# Altium PCB BAZ-DOTMATRIX-01R03.PcbDoc (part 3 of 3)
Units mil, origin at the board's own origin, x right, y up, seen from the top; angles counter-clockwise.
Board outline 13550 x 7110 mil, 2 copper layers (Top Layer, Bottom Layer); 256 components, 104 nets, 660 pads, 118 vias.
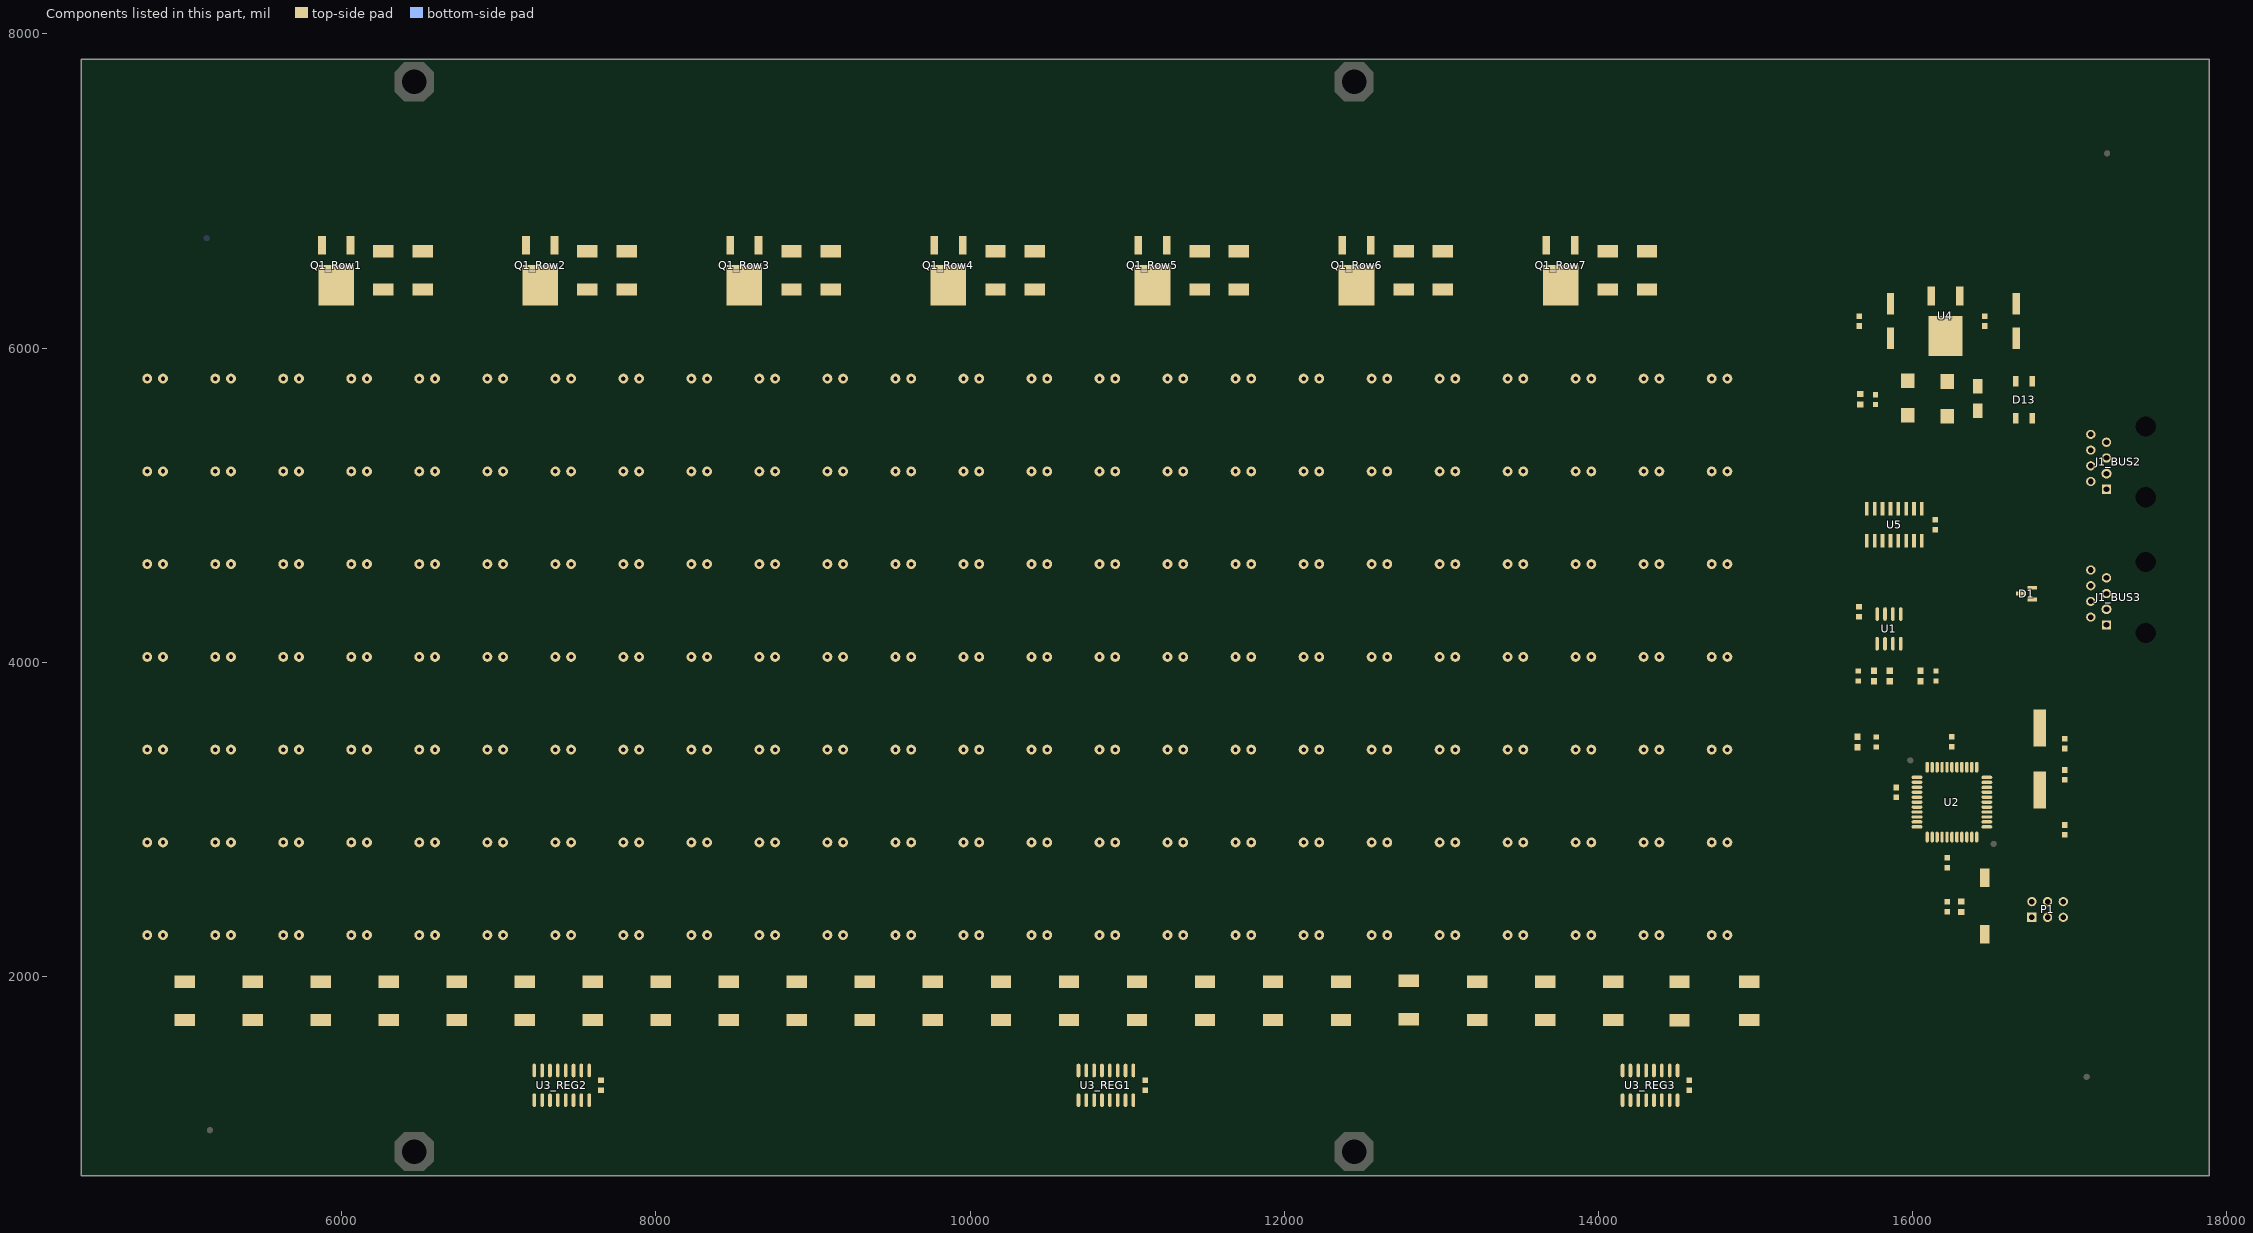
[diagram p3: the components of this part, seen from the top]

## Polygon pours and split planes (outlines as drawn) (continued)
RES12 on Top Layer "Top Layer-No Net" (solid, pour order 1000): 7521.18,2261.51 7521.18,2263.51 7623.18,2365.51 7623.18,2157.51
RES11 on Top Layer "Top Layer-No Net" (solid, pour order 1000): 7954.26,2852.06 7954.26,2854.06 8056.26,2956.06 8056.26,2748.06
RES11 on Top Layer "Top Layer-No Net" (solid, pour order 1000): 7954.26,5214.27 7954.26,5216.27 8056.26,5318.27 8056.26,5110.27
RES11 on Top Layer "Top Layer-No Net" (solid, pour order 1000): 7954.26,4623.72 7954.26,4625.72 8056.26,4727.72 8056.26,4519.72
RES11 on Top Layer "Top Layer-No Net" (solid, pour order 1000): 7954.26,4033.16 7954.26,4035.16 8056.26,4137.16 8056.26,3929.16
RES11 on Top Layer "Top Layer-No Net" (solid, pour order 1000): 7954.26,3442.61 7954.26,3444.61 8056.26,3546.61 8056.26,3338.61
RES11 on Top Layer "Top Layer-No Net" (solid, pour order 1000): 7954.26,2261.51 7954.26,2263.51 8056.26,2365.51 8056.26,2157.51
RES28 on Top Layer "Top Layer-No Net" (solid, pour order 1000): 8387.33,2852.06 8387.33,2854.06 8489.33,2956.06 8489.33,2748.06
RES28 on Top Layer "Top Layer-No Net" (solid, pour order 1000): 8387.33,5214.27 8387.33,5216.27 8489.33,5318.27 8489.33,5110.27
RES28 on Top Layer "Top Layer-No Net" (solid, pour order 1000): 8387.33,4623.72 8387.33,4625.72 8489.33,4727.72 8489.33,4519.72
RES28 on Top Layer "Top Layer-No Net" (solid, pour order 1000): 8387.33,4033.16 8387.33,4035.16 8489.33,4137.16 8489.33,3929.16
RES28 on Top Layer "Top Layer-No Net" (solid, pour order 1000): 8387.33,3442.61 8387.33,3444.61 8489.33,3546.61 8489.33,3338.61
RES28 on Top Layer "Top Layer-No Net" (solid, pour order 1000): 8387.33,2261.51 8387.33,2263.51 8489.33,2365.51 8489.33,2157.51
RES27 on Top Layer "Top Layer-No Net" (solid, pour order 1000): 8820.4,2852.06 8820.4,2854.06 8922.4,2956.06 8922.4,2748.06
RES27 on Top Layer "Top Layer-No Net" (solid, pour order 1000): 8820.4,5214.27 8820.4,5216.27 8922.4,5318.27 8922.4,5110.27
RES27 on Top Layer "Top Layer-No Net" (solid, pour order 1000): 8820.4,4623.72 8820.4,4625.72 8922.4,4727.72 8922.4,4519.72
RES27 on Top Layer "Top Layer-No Net" (solid, pour order 1000): 8820.4,4033.16 8820.4,4035.16 8922.4,4137.16 8922.4,3929.16
RES27 on Top Layer "Top Layer-No Net" (solid, pour order 1000): 8820.4,3442.61 8820.4,3444.61 8922.4,3546.61 8922.4,3338.61
RES27 on Top Layer "Top Layer-No Net" (solid, pour order 1000): 8820.4,2261.51 8820.4,2263.51 8922.4,2365.51 8922.4,2157.51
RES26 on Top Layer "Top Layer-No Net" (solid, pour order 1000): 9253.47,2852.06 9253.47,2854.06 9355.47,2956.06 9355.47,2748.06
RES26 on Top Layer "Top Layer-No Net" (solid, pour order 1000): 9253.47,5214.27 9253.47,5216.27 9355.47,5318.27 9355.47,5110.27
RES26 on Top Layer "Top Layer-No Net" (solid, pour order 1000): 9253.47,4623.72 9253.47,4625.72 9355.47,4727.72 9355.47,4519.72
RES26 on Top Layer "Top Layer-No Net" (solid, pour order 1000): 9253.47,4033.16 9253.47,4035.16 9355.47,4137.16 9355.47,3929.16
RES26 on Top Layer "Top Layer-No Net" (solid, pour order 1000): 9253.47,3442.61 9253.47,3444.61 9355.47,3546.61 9355.47,3338.61
RES26 on Top Layer "Top Layer-No Net" (solid, pour order 1000): 9253.47,2261.51 9253.47,2263.51 9355.47,2365.51 9355.47,2157.51
RES25 on Top Layer "Top Layer-No Net" (solid, pour order 1000): 9686.54,2852.06 9686.54,2854.06 9788.54,2956.06 9788.54,2748.06
RES25 on Top Layer "Top Layer-No Net" (solid, pour order 1000): 9686.54,5214.27 9686.54,5216.27 9788.54,5318.27 9788.54,5110.27
RES25 on Top Layer "Top Layer-No Net" (solid, pour order 1000): 9686.54,4623.72 9686.54,4625.72 9788.54,4727.72 9788.54,4519.72
RES25 on Top Layer "Top Layer-No Net" (solid, pour order 1000): 9686.54,4033.16 9686.54,4035.16 9788.54,4137.16 9788.54,3929.16
RES25 on Top Layer "Top Layer-No Net" (solid, pour order 1000): 9686.54,3442.61 9686.54,3444.61 9788.54,3546.61 9788.54,3338.61
RES25 on Top Layer "Top Layer-No Net" (solid, pour order 1000): 9686.54,2261.51 9686.54,2263.51 9788.54,2365.51 9788.54,2157.51
RES24 on Top Layer "Top Layer-No Net" (solid, pour order 1000): 10119.61,2852.06 10119.61,2854.06 10221.61,2956.06 10221.61,2748.06
RES24 on Top Layer "Top Layer-No Net" (solid, pour order 1000): 10119.61,5214.27 10119.61,5216.27 10221.61,5318.27 10221.61,5110.27
RES24 on Top Layer "Top Layer-No Net" (solid, pour order 1000): 10119.61,4623.72 10119.61,4625.72 10221.61,4727.72 10221.61,4519.72
RES24 on Top Layer "Top Layer-No Net" (solid, pour order 1000): 10119.61,4033.16 10119.61,4035.16 10221.61,4137.16 10221.61,3929.16
RES24 on Top Layer "Top Layer-No Net" (solid, pour order 1000): 10119.61,3442.61 10119.61,3444.61 10221.61,3546.61 10221.61,3338.61
RES24 on Top Layer "Top Layer-No Net" (solid, pour order 1000): 10119.61,2261.51 10119.61,2263.51 10221.61,2365.51 10221.61,2157.51
RES23 on Top Layer "Top Layer-No Net" (solid, pour order 1000): 10552.68,2852.06 10552.68,2854.06 10654.68,2956.06 10654.68,2748.06
RES23 on Top Layer "Top Layer-No Net" (solid, pour order 1000): 10552.68,5214.27 10552.68,5216.27 10654.68,5318.27 10654.68,5110.27
RES23 on Top Layer "Top Layer-No Net" (solid, pour order 1000): 10552.68,4623.72 10552.68,4625.72 10654.68,4727.72 10654.68,4519.72
RES23 on Top Layer "Top Layer-No Net" (solid, pour order 1000): 10552.68,4033.16 10552.68,4035.16 10654.68,4137.16 10654.68,3929.16
RES23 on Top Layer "Top Layer-No Net" (solid, pour order 1000): 10552.68,3442.61 10552.68,3444.61 10654.68,3546.61 10654.68,3338.61
RES23 on Top Layer "Top Layer-No Net" (solid, pour order 1000): 10552.68,2261.51 10552.68,2263.51 10654.68,2365.51 10654.68,2157.51
RES22 on Top Layer "Top Layer-No Net" (solid, pour order 1000): 10985.75,2852.06 10985.75,2854.06 11087.75,2956.06 11087.75,2748.06
RES22 on Top Layer "Top Layer-No Net" (solid, pour order 1000): 10985.75,5214.27 10985.75,5216.27 11087.75,5318.27 11087.75,5110.27
RES22 on Top Layer "Top Layer-No Net" (solid, pour order 1000): 10985.75,4623.72 10985.75,4625.72 11087.75,4727.72 11087.75,4519.72
RES22 on Top Layer "Top Layer-No Net" (solid, pour order 1000): 10985.75,4033.16 10985.75,4035.16 11087.75,4137.16 11087.75,3929.16
RES22 on Top Layer "Top Layer-No Net" (solid, pour order 1000): 10985.75,3442.61 10985.75,3444.61 11087.75,3546.61 11087.75,3338.61
RES22 on Top Layer "Top Layer-No Net" (solid, pour order 1000): 10985.75,2261.51 10985.75,2263.51 11087.75,2365.51 11087.75,2157.51
RES21 on Top Layer "Top Layer-No Net" (solid, pour order 1000): 11418.82,2852.06 11418.82,2854.06 11520.82,2956.06 11520.82,2748.06
RES21 on Top Layer "Top Layer-No Net" (solid, pour order 1000): 11418.82,5214.27 11418.82,5216.27 11520.82,5318.27 11520.82,5110.27
RES21 on Top Layer "Top Layer-No Net" (solid, pour order 1000): 11418.82,4623.72 11418.82,4625.72 11520.82,4727.72 11520.82,4519.72
RES21 on Top Layer "Top Layer-No Net" (solid, pour order 1000): 11418.82,4033.16 11418.82,4035.16 11520.82,4137.16 11520.82,3929.16
RES21 on Top Layer "Top Layer-No Net" (solid, pour order 1000): 11418.82,3442.61 11418.82,3444.61 11520.82,3546.61 11520.82,3338.61
RES21 on Top Layer "Top Layer-No Net" (solid, pour order 1000): 11418.82,2261.51 11418.82,2263.51 11520.82,2365.51 11520.82,2157.51
VCC on Top Layer "Top Layer-No Net" (solid, pour order 1000): 15155.41,2031 15153.41,2031 15051.41,2133 15259.41,2133
OUT_Row7 on Top Layer "Top Layer-No Net" (solid, pour order 1000): 13855,6107.73 13857,6107.73 13959,6005.73 13751,6005.73
OUT_Row7 on Top Layer "Top Layer-No Net" (solid, pour order 1000): 13780.1,6052.73 13755.1,6027.73 13755.1,5977.73 13780.1,5952.73 13930.1,5952.73 13955.1,5977.73 13955.1,6027.73 13930.1,6052.73
EXTSUPP_Row1 on Top Layer "Top Layer-No Net" (solid, pour order 1000): 14311.27,6808.12 14309.27,6808.12 14207.27,6910.12 14415.27,6910.12
EXTSUPP_Row1 on Top Layer "Top Layer-No Net" (solid, pour order 1000): 13670.27,6807.12 13668.27,6807.12 13566.27,6909.12 13774.27,6909.12
RES08 on Top Layer "Top Layer-No Net" (solid, pour order 1000): 11851.89,2261.51 11851.89,2263.51 11953.89,2365.51 11953.89,2157.51
RES08 on Top Layer "Top Layer-No Net" (solid, pour order 1000): 11851.89,3442.61 11851.89,3444.61 11953.89,3546.61 11953.89,3338.61
RES08 on Top Layer "Top Layer-No Net" (solid, pour order 1000): 11851.89,4033.16 11851.89,4035.16 11953.89,4137.16 11953.89,3929.16
RES08 on Top Layer "Top Layer-No Net" (solid, pour order 1000): 11851.89,4623.72 11851.89,4625.72 11953.89,4727.72 11953.89,4519.72
RES08 on Top Layer "Top Layer-No Net" (solid, pour order 1000): 11851.89,5214.27 11851.89,5216.27 11953.89,5318.27 11953.89,5110.27
RES08 on Top Layer "Top Layer-No Net" (solid, pour order 1000): 11851.89,2852.06 11851.89,2854.06 11953.89,2956.06 11953.89,2748.06
RES07 on Top Layer "Top Layer-No Net" (solid, pour order 1000): 12284.96,2261.51 12284.96,2263.51 12386.96,2365.51 12386.96,2157.51
RES07 on Top Layer "Top Layer-No Net" (solid, pour order 1000): 12284.96,3442.61 12284.96,3444.61 12386.96,3546.61 12386.96,3338.61
RES07 on Top Layer "Top Layer-No Net" (solid, pour order 1000): 12284.96,4033.16 12284.96,4035.16 12386.96,4137.16 12386.96,3929.16
RES07 on Top Layer "Top Layer-No Net" (solid, pour order 1000): 12284.96,4623.72 12284.96,4625.72 12386.96,4727.72 12386.96,4519.72
RES07 on Top Layer "Top Layer-No Net" (solid, pour order 1000): 12284.96,5214.27 12284.96,5216.27 12386.96,5318.27 12386.96,5110.27
RES07 on Top Layer "Top Layer-No Net" (solid, pour order 1000): 12284.96,2852.06 12284.96,2854.06 12386.96,2956.06 12386.96,2748.06
RES06 on Top Layer "Top Layer-No Net" (solid, pour order 1000): 12718.03,2261.51 12718.03,2263.51 12820.03,2365.51 12820.03,2157.51
RES06 on Top Layer "Top Layer-No Net" (solid, pour order 1000): 12718.03,3442.61 12718.03,3444.61 12820.03,3546.61 12820.03,3338.61
RES06 on Top Layer "Top Layer-No Net" (solid, pour order 1000): 12718.03,4033.16 12718.03,4035.16 12820.03,4137.16 12820.03,3929.16
RES06 on Top Layer "Top Layer-No Net" (solid, pour order 1000): 12718.03,4623.72 12718.03,4625.72 12820.03,4727.72 12820.03,4519.72
RES06 on Top Layer "Top Layer-No Net" (solid, pour order 1000): 12718.03,5214.27 12718.03,5216.27 12820.03,5318.27 12820.03,5110.27
RES06 on Top Layer "Top Layer-No Net" (solid, pour order 1000): 12718.03,2852.06 12718.03,2854.06 12820.03,2956.06 12820.03,2748.06
RES05 on Top Layer "Top Layer-No Net" (solid, pour order 1000): 13151.11,2261.51 13151.11,2263.51 13253.11,2365.51 13253.11,2157.51
RES05 on Top Layer "Top Layer-No Net" (solid, pour order 1000): 13151.11,3442.61 13151.11,3444.61 13253.11,3546.61 13253.11,3338.61
RES05 on Top Layer "Top Layer-No Net" (solid, pour order 1000): 13151.11,4033.16 13151.11,4035.16 13253.11,4137.16 13253.11,3929.16
RES05 on Top Layer "Top Layer-No Net" (solid, pour order 1000): 13151.11,4623.72 13151.11,4625.72 13253.11,4727.72 13253.11,4519.72
RES05 on Top Layer "Top Layer-No Net" (solid, pour order 1000): 13151.11,5214.27 13151.11,5216.27 13253.11,5318.27 13253.11,5110.27
RES05 on Top Layer "Top Layer-No Net" (solid, pour order 1000): 13151.11,2852.06 13151.11,2854.06 13253.11,2956.06 13253.11,2748.06
RES04 on Top Layer "Top Layer-No Net" (solid, pour order 1000): 13584.18,2261.51 13584.18,2263.51 13686.18,2365.51 13686.18,2157.51
RES04 on Top Layer "Top Layer-No Net" (solid, pour order 1000): 13584.18,3442.61 13584.18,3444.61 13686.18,3546.61 13686.18,3338.61
RES04 on Top Layer "Top Layer-No Net" (solid, pour order 1000): 13584.18,4033.16 13584.18,4035.16 13686.18,4137.16 13686.18,3929.16
RES04 on Top Layer "Top Layer-No Net" (solid, pour order 1000): 13584.18,4623.72 13584.18,4625.72 13686.18,4727.72 13686.18,4519.72
RES04 on Top Layer "Top Layer-No Net" (solid, pour order 1000): 13584.18,5214.27 13584.18,5216.27 13686.18,5318.27 13686.18,5110.27
RES04 on Top Layer "Top Layer-No Net" (solid, pour order 1000): 13584.18,2852.06 13584.18,2854.06 13686.18,2956.06 13686.18,2748.06
RES03 on Top Layer "Top Layer-No Net" (solid, pour order 1000): 14017.25,2261.51 14017.25,2263.51 14119.25,2365.51 14119.25,2157.51
RES03 on Top Layer "Top Layer-No Net" (solid, pour order 1000): 14017.25,3442.61 14017.25,3444.61 14119.25,3546.61 14119.25,3338.61
RES03 on Top Layer "Top Layer-No Net" (solid, pour order 1000): 14017.25,4033.16 14017.25,4035.16 14119.25,4137.16 14119.25,3929.16
RES03 on Top Layer "Top Layer-No Net" (solid, pour order 1000): 14017.25,4623.72 14017.25,4625.72 14119.25,4727.72 14119.25,4519.72
RES03 on Top Layer "Top Layer-No Net" (solid, pour order 1000): 14017.25,5214.27 14017.25,5216.27 14119.25,5318.27 14119.25,5110.27
RES03 on Top Layer "Top Layer-No Net" (solid, pour order 1000): 14017.25,2852.06 14017.25,2854.06 14119.25,2956.06 14119.25,2748.06
RES02 on Top Layer "Top Layer-No Net" (solid, pour order 1000): 14440.16,2261.43 14440.16,2263.43 14542.16,2365.43 14542.16,2157.43
RES02 on Top Layer "Top Layer-No Net" (solid, pour order 1000): 14440.16,3442.53 14440.16,3444.53 14542.16,3546.53 14542.16,3338.53
RES02 on Top Layer "Top Layer-No Net" (solid, pour order 1000): 14440.16,4033.09 14440.16,4035.09 14542.16,4137.09 14542.16,3929.09
RES02 on Top Layer "Top Layer-No Net" (solid, pour order 1000): 14440.16,4623.64 14440.16,4625.64 14542.16,4727.64 14542.16,4519.64
RES02 on Top Layer "Top Layer-No Net" (solid, pour order 1000): 14440.16,5214.19 14440.16,5216.19 14542.16,5318.19 14542.16,5110.19
RES02 on Top Layer "Top Layer-No Net" (solid, pour order 1000): 14440.16,2851.98 14440.16,2853.98 14542.16,2955.98 14542.16,2747.98
RES01 on Top Layer "Top Layer-No Net" (solid, pour order 1000): 14883.39,2852.06 14883.39,2854.06 14985.39,2956.06 14985.39,2748.06
RES01 on Top Layer "Top Layer-No Net" (solid, pour order 1000): 14883.39,5214.26 14883.39,5216.26 14985.39,5318.26 14985.39,5110.26
RES01 on Top Layer "Top Layer-No Net" (solid, pour order 1000): 14883.39,4623.71 14883.39,4625.71 14985.39,4727.71 14985.39,4519.71
RES01 on Top Layer "Top Layer-No Net" (solid, pour order 1000): 14883.39,4033.16 14883.39,4035.16 14985.39,4137.16 14985.39,3929.16
RES01 on Top Layer "Top Layer-No Net" (solid, pour order 1000): 14883.39,3442.61 14883.39,3444.61 14985.39,3546.61 14985.39,3338.61
RES01 on Top Layer "Top Layer-No Net" (solid, pour order 1000): 14883.39,2261.51 14883.39,2263.51 14985.39,2365.51 14985.39,2157.51
EXTSUPP_Row1 on Top Layer "Top Layer-No Net" (solid, pour order 1015): 16299.8,6790.57 16297.8,6790.57 16195.8,6892.57 16403.8,6892.57
VCC on Top Layer "Top Layer-No Net" (solid, pour order 1015): 15382.71,3397.05 15382.71,3395.05 15280.71,3293.05 15280.71,3501.05
VCC on Top Layer "Top Layer-No Net" (solid, pour order 1015): 15382.71,3612.05 15382.71,3610.05 15280.71,3508.05 15280.71,3716.05
VCC on Top Layer "Top Layer-No Net" (solid, pour order 1015): 15385.71,4397.05 15385.71,4395.05 15283.71,4293.05 15283.71,4501.05
A on Top Layer "Top Layer-No Net" (solid, pour order 1001): 16670.71,4307.05 16763.31,4399.65 17043.31,4399.65 17045.71,4402.05 16950.71,4307.05
B on Top Layer "Top Layer-No Net" (solid, pour order 1000): 16763.31,4474.45 17053.31,4474.45 16948.31,4579.45 16658.31,4579.45
VCC on Top Layer "Top Layer-No Net" (solid, pour order 1007): 15229,2080 15254,2105 15254,2155 15229,2180 15079,2180 15054,2155 15054,2105 15079,2080
VCC on Top Layer "Top Layer-No Net" (solid, pour order 1015): 15387,4875 15387,4873 15285,4771 15285,4979
GND on Bottom Layer "Top Layer-No Net" (solid, pour order 1001): 17890,7840 17890,730 4340,730 4340,7840
OUT_Row1 on Bottom Layer "Top Layer-No Net" (solid, pour order 1018): 6134.83,2410.42 6159.83,2435.42 6159.83,2485.42 6134.83,2510.42 5984.83,2510.42 5959.83,2485.42 5959.83,2435.42 5984.83,2410.42
OUT_Row2 on Bottom Layer "Top Layer-No Net" (solid, pour order 1018): 7434.04,3000.97 7459.04,3025.97 7459.04,3075.97 7434.04,3100.97 7284.04,3100.97 7259.04,3075.97 7259.04,3025.97 7284.04,3000.97
OUT_Row3 on Bottom Layer "Top Layer-No Net" (solid, pour order 1018): 8733.25,3591.52 8758.25,3616.52 8758.25,3666.52 8733.25,3691.52 8583.25,3691.52 8558.25,3666.52 8558.25,3616.52 8583.25,3591.52
OUT_Row4 on Bottom Layer "Top Layer-No Net" (solid, pour order 1018): 10032.46,4182.07 10057.46,4207.07 10057.46,4257.07 10032.46,4282.07 9882.46,4282.07 9857.46,4257.07 9857.46,4207.07 9882.46,4182.07
OUT_Row5 on Bottom Layer "Top Layer-No Net" (solid, pour order 1018): 11331.68,4772.62 11356.68,4797.62 11356.68,4847.62 11331.68,4872.62 11181.68,4872.62 11156.68,4847.62 11156.68,4797.62 11181.68,4772.62
OUT_Row6 on Bottom Layer "Top Layer-No Net" (solid, pour order 1018): 12630.89,5363.17 12655.89,5388.17 12655.89,5438.17 12630.89,5463.17 12480.89,5463.17 12455.89,5438.17 12455.89,5388.17 12480.89,5363.17
OUT_Row7 on Bottom Layer "Top Layer-No Net" (solid, pour order 1018): 13930.1,5953.73 13955.1,5978.73 13955.1,6028.73 13930.1,6053.73 13780.1,6053.73 13755.1,6028.73 13755.1,5978.73 13780.1,5953.73
VCC on Bottom Layer "Top Layer-No Net" (solid, pour order 1018): 8299.87,2081 8324.87,2106 8324.87,2156 8299.87,2181 8149.87,2181 8124.87,2156 8124.87,2106 8149.87,2081
VCC on Bottom Layer "Top Layer-No Net" (solid, pour order 1018): 11764.43,2081 11789.43,2106 11789.43,2156 11764.43,2181 11614.43,2181 11589.43,2156 11589.43,2106 11614.43,2081
OUT_Row7 on Bottom Layer "Top Layer-No Net" (solid, pour order 1000): 14289.62,5925.12 14287.62,5925.12 14185.62,6027.12 14393.62,6027.12
OUT_Row7 on Bottom Layer "Top Layer-No Net" (solid, pour order 1000): 13856.55,5925.12 13854.55,5925.12 13752.55,6027.12 13960.55,6027.12
OUT_Row7 on Bottom Layer "Top Layer-No Net" (solid, pour order 1000): 13423.48,5925.12 13421.48,5925.12 13319.48,6027.12 13527.48,6027.12
OUT_Row7 on Bottom Layer "Top Layer-No Net" (solid, pour order 1000): 12990.41,5925.12 12988.41,5925.12 12886.41,6027.12 13094.41,6027.12
OUT_Row7 on Bottom Layer "Top Layer-No Net" (solid, pour order 1000): 12557.34,5925.12 12555.34,5925.12 12453.34,6027.12 12661.34,6027.12
OUT_Row7 on Bottom Layer "Top Layer-No Net" (solid, pour order 1000): 12124.27,5925.12 12122.27,5925.12 12020.27,6027.12 12228.27,6027.12
OUT_Row7 on Bottom Layer "Top Layer-No Net" (solid, pour order 1000): 11691.2,5925.12 11689.2,5925.12 11587.2,6027.12 11795.2,6027.12
OUT_Row7 on Bottom Layer "Top Layer-No Net" (solid, pour order 1000): 11258.13,5925.12 11256.13,5925.12 11154.13,6027.12 11362.13,6027.12
OUT_Row7 on Bottom Layer "Top Layer-No Net" (solid, pour order 1000): 10825.06,5925.12 10823.06,5925.12 10721.06,6027.12 10929.06,6027.12
OUT_Row7 on Bottom Layer "Top Layer-No Net" (solid, pour order 1000): 10391.99,5925.12 10389.99,5925.12 10287.99,6027.12 10495.99,6027.12
OUT_Row7 on Bottom Layer "Top Layer-No Net" (solid, pour order 1000): 9958.92,5925.12 9956.92,5925.12 9854.92,6027.12 10062.92,6027.12
OUT_Row7 on Bottom Layer "Top Layer-No Net" (solid, pour order 1000): 9525.84,5925.12 9523.84,5925.12 9421.84,6027.12 9629.84,6027.12
OUT_Row7 on Bottom Layer "Top Layer-No Net" (solid, pour order 1000): 9092.77,5925.12 9090.77,5925.12 8988.77,6027.12 9196.77,6027.12
OUT_Row7 on Bottom Layer "Top Layer-No Net" (solid, pour order 1000): 8659.7,5925.12 8657.7,5925.12 8555.7,6027.12 8763.7,6027.12
OUT_Row7 on Bottom Layer "Top Layer-No Net" (solid, pour order 1000): 8226.63,5925.12 8224.63,5925.12 8122.63,6027.12 8330.63,6027.12
OUT_Row7 on Bottom Layer "Top Layer-No Net" (solid, pour order 1000): 7793.56,5925.12 7791.56,5925.12 7689.56,6027.12 7897.56,6027.12
OUT_Row7 on Bottom Layer "Top Layer-No Net" (solid, pour order 1000): 7360.49,5925.12 7358.49,5925.12 7256.49,6027.12 7464.49,6027.12
OUT_Row7 on Bottom Layer "Top Layer-No Net" (solid, pour order 1000): 6927.42,5925.12 6925.42,5925.12 6823.42,6027.12 7031.42,6027.12
OUT_Row7 on Bottom Layer "Top Layer-No Net" (solid, pour order 1000): 6494.35,5925.12 6492.35,5925.12 6390.35,6027.12 6598.35,6027.12
OUT_Row7 on Bottom Layer "Top Layer-No Net" (solid, pour order 1000): 6061.28,5925.12 6059.28,5925.12 5957.28,6027.12 6165.28,6027.12
OUT_Row7 on Bottom Layer "Top Layer-No Net" (solid, pour order 1000): 5628.21,5925.12 5626.21,5925.12 5524.21,6027.12 5732.21,6027.12
OUT_Row7 on Bottom Layer "Top Layer-No Net" (solid, pour order 1000): 5195.14,5925.12 5193.14,5925.12 5091.14,6027.12 5299.14,6027.12
OUT_Row6 on Bottom Layer "Top Layer-No Net" (solid, pour order 1000): 14289.62,5334.57 14287.62,5334.57 14185.62,5436.57 14393.62,5436.57
OUT_Row6 on Bottom Layer "Top Layer-No Net" (solid, pour order 1000): 13856.55,5334.57 13854.55,5334.57 13752.55,5436.57 13960.55,5436.57
OUT_Row6 on Bottom Layer "Top Layer-No Net" (solid, pour order 1000): 13423.48,5334.57 13421.48,5334.57 13319.48,5436.57 13527.48,5436.57
OUT_Row6 on Bottom Layer "Top Layer-No Net" (solid, pour order 1000): 12990.41,5334.57 12988.41,5334.57 12886.41,5436.57 13094.41,5436.57
OUT_Row6 on Bottom Layer "Top Layer-No Net" (solid, pour order 1000): 12557.34,5334.57 12555.34,5334.57 12453.34,5436.57 12661.34,5436.57
OUT_Row6 on Bottom Layer "Top Layer-No Net" (solid, pour order 1000): 12124.27,5334.57 12122.27,5334.57 12020.27,5436.57 12228.27,5436.57
OUT_Row6 on Bottom Layer "Top Layer-No Net" (solid, pour order 1000): 11691.2,5334.57 11689.2,5334.57 11587.2,5436.57 11795.2,5436.57
OUT_Row6 on Bottom Layer "Top Layer-No Net" (solid, pour order 1000): 11258.13,5334.57 11256.13,5334.57 11154.13,5436.57 11362.13,5436.57
OUT_Row6 on Bottom Layer "Top Layer-No Net" (solid, pour order 1000): 10825.06,5334.57 10823.06,5334.57 10721.06,5436.57 10929.06,5436.57
OUT_Row6 on Bottom Layer "Top Layer-No Net" (solid, pour order 1000): 10391.99,5334.57 10389.99,5334.57 10287.99,5436.57 10495.99,5436.57
OUT_Row6 on Bottom Layer "Top Layer-No Net" (solid, pour order 1000): 9958.92,5334.57 9956.92,5334.57 9854.92,5436.57 10062.92,5436.57
OUT_Row6 on Bottom Layer "Top Layer-No Net" (solid, pour order 1000): 9525.84,5334.57 9523.84,5334.57 9421.84,5436.57 9629.84,5436.57
OUT_Row6 on Bottom Layer "Top Layer-No Net" (solid, pour order 1000): 9092.77,5334.57 9090.77,5334.57 8988.77,5436.57 9196.77,5436.57
OUT_Row6 on Bottom Layer "Top Layer-No Net" (solid, pour order 1000): 8659.7,5334.57 8657.7,5334.57 8555.7,5436.57 8763.7,5436.57
OUT_Row6 on Bottom Layer "Top Layer-No Net" (solid, pour order 1000): 8226.63,5334.57 8224.63,5334.57 8122.63,5436.57 8330.63,5436.57
OUT_Row6 on Bottom Layer "Top Layer-No Net" (solid, pour order 1000): 7793.56,5334.57 7791.56,5334.57 7689.56,5436.57 7897.56,5436.57
OUT_Row6 on Bottom Layer "Top Layer-No Net" (solid, pour order 1000): 7360.49,5334.57 7358.49,5334.57 7256.49,5436.57 7464.49,5436.57
OUT_Row6 on Bottom Layer "Top Layer-No Net" (solid, pour order 1000): 6927.42,5334.57 6925.42,5334.57 6823.42,5436.57 7031.42,5436.57
OUT_Row6 on Bottom Layer "Top Layer-No Net" (solid, pour order 1000): 6494.35,5334.57 6492.35,5334.57 6390.35,5436.57 6598.35,5436.57
OUT_Row6 on Bottom Layer "Top Layer-No Net" (solid, pour order 1000): 6061.28,5334.57 6059.28,5334.57 5957.28,5436.57 6165.28,5436.57
OUT_Row6 on Bottom Layer "Top Layer-No Net" (solid, pour order 1000): 5628.21,5334.57 5626.21,5334.57 5524.21,5436.57 5732.21,5436.57
OUT_Row6 on Bottom Layer "Top Layer-No Net" (solid, pour order 1000): 5195.14,5334.57 5193.14,5334.57 5091.14,5436.57 5299.14,5436.57
OUT_Row5 on Bottom Layer "Top Layer-No Net" (solid, pour order 1000): 14289.62,4744.02 14287.62,4744.02 14185.62,4846.02 14393.62,4846.02
OUT_Row5 on Bottom Layer "Top Layer-No Net" (solid, pour order 1000): 13856.55,4744.02 13854.55,4744.02 13752.55,4846.02 13960.55,4846.02
OUT_Row5 on Bottom Layer "Top Layer-No Net" (solid, pour order 1000): 13423.48,4744.02 13421.48,4744.02 13319.48,4846.02 13527.48,4846.02
OUT_Row5 on Bottom Layer "Top Layer-No Net" (solid, pour order 1000): 12990.41,4744.02 12988.41,4744.02 12886.41,4846.02 13094.41,4846.02
OUT_Row5 on Bottom Layer "Top Layer-No Net" (solid, pour order 1000): 12557.34,4744.02 12555.34,4744.02 12453.34,4846.02 12661.34,4846.02
OUT_Row5 on Bottom Layer "Top Layer-No Net" (solid, pour order 1000): 12124.27,4744.02 12122.27,4744.02 12020.27,4846.02 12228.27,4846.02
OUT_Row5 on Bottom Layer "Top Layer-No Net" (solid, pour order 1000): 11691.2,4744.02 11689.2,4744.02 11587.2,4846.02 11795.2,4846.02
OUT_Row5 on Bottom Layer "Top Layer-No Net" (solid, pour order 1000): 11258.13,4744.02 11256.13,4744.02 11154.13,4846.02 11362.13,4846.02
OUT_Row5 on Bottom Layer "Top Layer-No Net" (solid, pour order 1000): 10825.06,4744.02 10823.06,4744.02 10721.06,4846.02 10929.06,4846.02
OUT_Row5 on Bottom Layer "Top Layer-No Net" (solid, pour order 1000): 10391.99,4744.02 10389.99,4744.02 10287.99,4846.02 10495.99,4846.02
OUT_Row5 on Bottom Layer "Top Layer-No Net" (solid, pour order 1000): 9958.92,4744.02 9956.92,4744.02 9854.92,4846.02 10062.92,4846.02
OUT_Row5 on Bottom Layer "Top Layer-No Net" (solid, pour order 1000): 9525.84,4744.02 9523.84,4744.02 9421.84,4846.02 9629.84,4846.02
OUT_Row5 on Bottom Layer "Top Layer-No Net" (solid, pour order 1000): 9092.77,4744.02 9090.77,4744.02 8988.77,4846.02 9196.77,4846.02
OUT_Row5 on Bottom Layer "Top Layer-No Net" (solid, pour order 1000): 8659.7,4744.02 8657.7,4744.02 8555.7,4846.02 8763.7,4846.02
OUT_Row5 on Bottom Layer "Top Layer-No Net" (solid, pour order 1000): 8226.63,4744.02 8224.63,4744.02 8122.63,4846.02 8330.63,4846.02
OUT_Row5 on Bottom Layer "Top Layer-No Net" (solid, pour order 1000): 7793.56,4744.02 7791.56,4744.02 7689.56,4846.02 7897.56,4846.02
OUT_Row5 on Bottom Layer "Top Layer-No Net" (solid, pour order 1000): 7360.49,4744.02 7358.49,4744.02 7256.49,4846.02 7464.49,4846.02
OUT_Row5 on Bottom Layer "Top Layer-No Net" (solid, pour order 1000): 6927.42,4744.02 6925.42,4744.02 6823.42,4846.02 7031.42,4846.02
OUT_Row5 on Bottom Layer "Top Layer-No Net" (solid, pour order 1000): 6494.35,4744.02 6492.35,4744.02 6390.35,4846.02 6598.35,4846.02
OUT_Row5 on Bottom Layer "Top Layer-No Net" (solid, pour order 1000): 6061.28,4744.02 6059.28,4744.02 5957.28,4846.02 6165.28,4846.02
OUT_Row5 on Bottom Layer "Top Layer-No Net" (solid, pour order 1000): 5628.21,4744.02 5626.21,4744.02 5524.21,4846.02 5732.21,4846.02
OUT_Row5 on Bottom Layer "Top Layer-No Net" (solid, pour order 1000): 5195.14,4744.02 5193.14,4744.02 5091.14,4846.02 5299.14,4846.02
OUT_Row4 on Bottom Layer "Top Layer-No Net" (solid, pour order 1000): 14289.62,4153.47 14287.62,4153.47 14185.62,4255.47 14393.62,4255.47
OUT_Row4 on Bottom Layer "Top Layer-No Net" (solid, pour order 1000): 13856.55,4153.47 13854.55,4153.47 13752.55,4255.47 13960.55,4255.47
OUT_Row4 on Bottom Layer "Top Layer-No Net" (solid, pour order 1000): 13423.48,4153.47 13421.48,4153.47 13319.48,4255.47 13527.48,4255.47
OUT_Row4 on Bottom Layer "Top Layer-No Net" (solid, pour order 1000): 12990.41,4153.47 12988.41,4153.47 12886.41,4255.47 13094.41,4255.47
OUT_Row4 on Bottom Layer "Top Layer-No Net" (solid, pour order 1000): 12557.34,4153.47 12555.34,4153.47 12453.34,4255.47 12661.34,4255.47
OUT_Row4 on Bottom Layer "Top Layer-No Net" (solid, pour order 1000): 12124.27,4153.47 12122.27,4153.47 12020.27,4255.47 12228.27,4255.47
OUT_Row4 on Bottom Layer "Top Layer-No Net" (solid, pour order 1000): 11691.2,4153.47 11689.2,4153.47 11587.2,4255.47 11795.2,4255.47
OUT_Row4 on Bottom Layer "Top Layer-No Net" (solid, pour order 1000): 11258.13,4153.47 11256.13,4153.47 11154.13,4255.47 11362.13,4255.47
OUT_Row4 on Bottom Layer "Top Layer-No Net" (solid, pour order 1000): 10825.06,4153.47 10823.06,4153.47 10721.06,4255.47 10929.06,4255.47
OUT_Row4 on Bottom Layer "Top Layer-No Net" (solid, pour order 1000): 10391.99,4153.47 10389.99,4153.47 10287.99,4255.47 10495.99,4255.47
OUT_Row4 on Bottom Layer "Top Layer-No Net" (solid, pour order 1000): 9958.92,4153.47 9956.92,4153.47 9854.92,4255.47 10062.92,4255.47
OUT_Row4 on Bottom Layer "Top Layer-No Net" (solid, pour order 1000): 9525.84,4153.47 9523.84,4153.47 9421.84,4255.47 9629.84,4255.47
OUT_Row4 on Bottom Layer "Top Layer-No Net" (solid, pour order 1000): 9092.77,4153.47 9090.77,4153.47 8988.77,4255.47 9196.77,4255.47
OUT_Row4 on Bottom Layer "Top Layer-No Net" (solid, pour order 1000): 8659.7,4153.47 8657.7,4153.47 8555.7,4255.47 8763.7,4255.47
OUT_Row4 on Bottom Layer "Top Layer-No Net" (solid, pour order 1000): 8226.63,4153.47 8224.63,4153.47 8122.63,4255.47 8330.63,4255.47
OUT_Row4 on Bottom Layer "Top Layer-No Net" (solid, pour order 1000): 7793.56,4153.47 7791.56,4153.47 7689.56,4255.47 7897.56,4255.47
OUT_Row4 on Bottom Layer "Top Layer-No Net" (solid, pour order 1000): 7360.49,4153.47 7358.49,4153.47 7256.49,4255.47 7464.49,4255.47
OUT_Row4 on Bottom Layer "Top Layer-No Net" (solid, pour order 1000): 6927.42,4153.47 6925.42,4153.47 6823.42,4255.47 7031.42,4255.47
OUT_Row4 on Bottom Layer "Top Layer-No Net" (solid, pour order 1000): 6494.35,4153.47 6492.35,4153.47 6390.35,4255.47 6598.35,4255.47
OUT_Row4 on Bottom Layer "Top Layer-No Net" (solid, pour order 1000): 6061.28,4153.47 6059.28,4153.47 5957.28,4255.47 6165.28,4255.47
OUT_Row4 on Bottom Layer "Top Layer-No Net" (solid, pour order 1000): 5628.21,4153.47 5626.21,4153.47 5524.21,4255.47 5732.21,4255.47
OUT_Row4 on Bottom Layer "Top Layer-No Net" (solid, pour order 1000): 5195.14,4153.47 5193.14,4153.47 5091.14,4255.47 5299.14,4255.47
OUT_Row3 on Bottom Layer "Top Layer-No Net" (solid, pour order 1000): 14289.62,3562.92 14287.62,3562.92 14185.62,3664.92 14393.62,3664.92
OUT_Row3 on Bottom Layer "Top Layer-No Net" (solid, pour order 1000): 13856.55,3562.92 13854.55,3562.92 13752.55,3664.92 13960.55,3664.92
OUT_Row3 on Bottom Layer "Top Layer-No Net" (solid, pour order 1000): 13423.48,3562.92 13421.48,3562.92 13319.48,3664.92 13527.48,3664.92
OUT_Row3 on Bottom Layer "Top Layer-No Net" (solid, pour order 1000): 12990.41,3562.92 12988.41,3562.92 12886.41,3664.92 13094.41,3664.92
OUT_Row3 on Bottom Layer "Top Layer-No Net" (solid, pour order 1000): 12557.34,3562.92 12555.34,3562.92 12453.34,3664.92 12661.34,3664.92
OUT_Row3 on Bottom Layer "Top Layer-No Net" (solid, pour order 1000): 12124.27,3562.92 12122.27,3562.92 12020.27,3664.92 12228.27,3664.92
OUT_Row3 on Bottom Layer "Top Layer-No Net" (solid, pour order 1000): 11691.2,3562.92 11689.2,3562.92 11587.2,3664.92 11795.2,3664.92
OUT_Row3 on Bottom Layer "Top Layer-No Net" (solid, pour order 1000): 11258.13,3562.92 11256.13,3562.92 11154.13,3664.92 11362.13,3664.92
OUT_Row3 on Bottom Layer "Top Layer-No Net" (solid, pour order 1000): 10825.06,3562.92 10823.06,3562.92 10721.06,3664.92 10929.06,3664.92
OUT_Row3 on Bottom Layer "Top Layer-No Net" (solid, pour order 1000): 10391.99,3562.92 10389.99,3562.92 10287.99,3664.92 10495.99,3664.92
OUT_Row3 on Bottom Layer "Top Layer-No Net" (solid, pour order 1000): 9958.92,3562.92 9956.92,3562.92 9854.92,3664.92 10062.92,3664.92
OUT_Row3 on Bottom Layer "Top Layer-No Net" (solid, pour order 1000): 9525.84,3562.92 9523.84,3562.92 9421.84,3664.92 9629.84,3664.92
OUT_Row3 on Bottom Layer "Top Layer-No Net" (solid, pour order 1000): 9092.77,3562.92 9090.77,3562.92 8988.77,3664.92 9196.77,3664.92
OUT_Row3 on Bottom Layer "Top Layer-No Net" (solid, pour order 1000): 8659.7,3562.92 8657.7,3562.92 8555.7,3664.92 8763.7,3664.92
OUT_Row3 on Bottom Layer "Top Layer-No Net" (solid, pour order 1000): 8226.63,3562.92 8224.63,3562.92 8122.63,3664.92 8330.63,3664.92
OUT_Row3 on Bottom Layer "Top Layer-No Net" (solid, pour order 1000): 7793.56,3562.92 7791.56,3562.92 7689.56,3664.92 7897.56,3664.92
OUT_Row3 on Bottom Layer "Top Layer-No Net" (solid, pour order 1000): 7360.49,3562.92 7358.49,3562.92 7256.49,3664.92 7464.49,3664.92
OUT_Row3 on Bottom Layer "Top Layer-No Net" (solid, pour order 1000): 6927.42,3562.92 6925.42,3562.92 6823.42,3664.92 7031.42,3664.92
OUT_Row3 on Bottom Layer "Top Layer-No Net" (solid, pour order 1000): 6494.35,3562.92 6492.35,3562.92 6390.35,3664.92 6598.35,3664.92
OUT_Row3 on Bottom Layer "Top Layer-No Net" (solid, pour order 1000): 6061.28,3562.92 6059.28,3562.92 5957.28,3664.92 6165.28,3664.92
OUT_Row3 on Bottom Layer "Top Layer-No Net" (solid, pour order 1000): 5628.21,3562.92 5626.21,3562.92 5524.21,3664.92 5732.21,3664.92
OUT_Row3 on Bottom Layer "Top Layer-No Net" (solid, pour order 1000): 5195.14,3562.92 5193.14,3562.92 5091.14,3664.92 5299.14,3664.92
OUT_Row2 on Bottom Layer "Top Layer-No Net" (solid, pour order 1000): 14289.62,2972.37 14287.62,2972.37 14185.62,3074.37 14393.62,3074.37
OUT_Row2 on Bottom Layer "Top Layer-No Net" (solid, pour order 1000): 13856.55,2972.37 13854.55,2972.37 13752.55,3074.37 13960.55,3074.37
OUT_Row2 on Bottom Layer "Top Layer-No Net" (solid, pour order 1000): 13423.48,2972.37 13421.48,2972.37 13319.48,3074.37 13527.48,3074.37
OUT_Row2 on Bottom Layer "Top Layer-No Net" (solid, pour order 1000): 12990.41,2972.37 12988.41,2972.37 12886.41,3074.37 13094.41,3074.37
OUT_Row2 on Bottom Layer "Top Layer-No Net" (solid, pour order 1000): 12557.34,2972.37 12555.34,2972.37 12453.34,3074.37 12661.34,3074.37
OUT_Row2 on Bottom Layer "Top Layer-No Net" (solid, pour order 1000): 12124.27,2972.37 12122.27,2972.37 12020.27,3074.37 12228.27,3074.37
OUT_Row2 on Bottom Layer "Top Layer-No Net" (solid, pour order 1000): 11691.2,2972.37 11689.2,2972.37 11587.2,3074.37 11795.2,3074.37
OUT_Row2 on Bottom Layer "Top Layer-No Net" (solid, pour order 1000): 11258.13,2972.37 11256.13,2972.37 11154.13,3074.37 11362.13,3074.37
OUT_Row2 on Bottom Layer "Top Layer-No Net" (solid, pour order 1000): 10825.06,2972.37 10823.06,2972.37 10721.06,3074.37 10929.06,3074.37
OUT_Row2 on Bottom Layer "Top Layer-No Net" (solid, pour order 1000): 10391.99,2972.37 10389.99,2972.37 10287.99,3074.37 10495.99,3074.37
OUT_Row2 on Bottom Layer "Top Layer-No Net" (solid, pour order 1000): 9958.92,2972.37 9956.92,2972.37 9854.92,3074.37 10062.92,3074.37
OUT_Row2 on Bottom Layer "Top Layer-No Net" (solid, pour order 1000): 9525.84,2972.37 9523.84,2972.37 9421.84,3074.37 9629.84,3074.37
OUT_Row2 on Bottom Layer "Top Layer-No Net" (solid, pour order 1000): 9092.77,2972.37 9090.77,2972.37 8988.77,3074.37 9196.77,3074.37
OUT_Row2 on Bottom Layer "Top Layer-No Net" (solid, pour order 1000): 8659.7,2972.37 8657.7,2972.37 8555.7,3074.37 8763.7,3074.37
OUT_Row2 on Bottom Layer "Top Layer-No Net" (solid, pour order 1000): 8226.63,2972.37 8224.63,2972.37 8122.63,3074.37 8330.63,3074.37
OUT_Row2 on Bottom Layer "Top Layer-No Net" (solid, pour order 1000): 7793.56,2972.37 7791.56,2972.37 7689.56,3074.37 7897.56,3074.37
OUT_Row2 on Bottom Layer "Top Layer-No Net" (solid, pour order 1000): 7360.49,2972.37 7358.49,2972.37 7256.49,3074.37 7464.49,3074.37
OUT_Row2 on Bottom Layer "Top Layer-No Net" (solid, pour order 1000): 6927.42,2972.37 6925.42,2972.37 6823.42,3074.37 7031.42,3074.37
OUT_Row2 on Bottom Layer "Top Layer-No Net" (solid, pour order 1000): 6494.35,2972.37 6492.35,2972.37 6390.35,3074.37 6598.35,3074.37
OUT_Row2 on Bottom Layer "Top Layer-No Net" (solid, pour order 1000): 6061.28,2972.37 6059.28,2972.37 5957.28,3074.37 6165.28,3074.37
OUT_Row2 on Bottom Layer "Top Layer-No Net" (solid, pour order 1000): 5628.21,2972.37 5626.21,2972.37 5524.21,3074.37 5732.21,3074.37
OUT_Row2 on Bottom Layer "Top Layer-No Net" (solid, pour order 1000): 5195.14,2972.37 5193.14,2972.37 5091.14,3074.37 5299.14,3074.37
OUT_Row1 on Bottom Layer "Top Layer-No Net" (solid, pour order 1000): 5195.14,2381.82 5193.14,2381.82 5091.14,2483.82 5299.14,2483.82
OUT_Row1 on Bottom Layer "Top Layer-No Net" (solid, pour order 1000): 5628.21,2381.82 5626.21,2381.82 5524.21,2483.82 5732.21,2483.82
OUT_Row1 on Bottom Layer "Top Layer-No Net" (solid, pour order 1000): 6061.28,2381.82 6059.28,2381.82 5957.28,2483.82 6165.28,2483.82
OUT_Row1 on Bottom Layer "Top Layer-No Net" (solid, pour order 1000): 6494.35,2381.82 6492.35,2381.82 6390.35,2483.82 6598.35,2483.82
OUT_Row1 on Bottom Layer "Top Layer-No Net" (solid, pour order 1000): 6927.42,2381.82 6925.42,2381.82 6823.42,2483.82 7031.42,2483.82
OUT_Row1 on Bottom Layer "Top Layer-No Net" (solid, pour order 1000): 7360.49,2381.82 7358.49,2381.82 7256.49,2483.82 7464.49,2483.82
OUT_Row1 on Bottom Layer "Top Layer-No Net" (solid, pour order 1000): 7793.56,2381.82 7791.56,2381.82 7689.56,2483.82 7897.56,2483.82
OUT_Row1 on Bottom Layer "Top Layer-No Net" (solid, pour order 1000): 8226.63,2381.82 8224.63,2381.82 8122.63,2483.82 8330.63,2483.82
OUT_Row1 on Bottom Layer "Top Layer-No Net" (solid, pour order 1000): 8659.7,2381.82 8657.7,2381.82 8555.7,2483.82 8763.7,2483.82
OUT_Row1 on Bottom Layer "Top Layer-No Net" (solid, pour order 1000): 9092.77,2381.82 9090.77,2381.82 8988.77,2483.82 9196.77,2483.82
OUT_Row1 on Bottom Layer "Top Layer-No Net" (solid, pour order 1000): 9525.84,2381.82 9523.84,2381.82 9421.84,2483.82 9629.84,2483.82
OUT_Row1 on Bottom Layer "Top Layer-No Net" (solid, pour order 1000): 9958.92,2381.82 9956.92,2381.82 9854.92,2483.82 10062.92,2483.82
OUT_Row1 on Bottom Layer "Top Layer-No Net" (solid, pour order 1000): 10391.99,2381.82 10389.99,2381.82 10287.99,2483.82 10495.99,2483.82
OUT_Row1 on Bottom Layer "Top Layer-No Net" (solid, pour order 1000): 10825.06,2381.82 10823.06,2381.82 10721.06,2483.82 10929.06,2483.82
OUT_Row1 on Bottom Layer "Top Layer-No Net" (solid, pour order 1000): 11258.13,2381.82 11256.13,2381.82 11154.13,2483.82 11362.13,2483.82
OUT_Row1 on Bottom Layer "Top Layer-No Net" (solid, pour order 1000): 11691.2,2381.82 11689.2,2381.82 11587.2,2483.82 11795.2,2483.82
OUT_Row1 on Bottom Layer "Top Layer-No Net" (solid, pour order 1000): 12124.27,2381.82 12122.27,2381.82 12020.27,2483.82 12228.27,2483.82
OUT_Row1 on Bottom Layer "Top Layer-No Net" (solid, pour order 1000): 12557.34,2381.82 12555.34,2381.82 12453.34,2483.82 12661.34,2483.82
OUT_Row1 on Bottom Layer "Top Layer-No Net" (solid, pour order 1000): 12990.41,2381.82 12988.41,2381.82 12886.41,2483.82 13094.41,2483.82
OUT_Row1 on Bottom Layer "Top Layer-No Net" (solid, pour order 1000): 13423.48,2381.82 13421.48,2381.82 13319.48,2483.82 13527.48,2483.82
OUT_Row1 on Bottom Layer "Top Layer-No Net" (solid, pour order 1000): 13856.55,2381.82 13854.55,2381.82 13752.55,2483.82 13960.55,2483.82
OUT_Row1 on Bottom Layer "Top Layer-No Net" (solid, pour order 1000): 14289.62,2381.82 14287.62,2381.82 14185.62,2483.82 14393.62,2483.82
VCC on Bottom Layer "Top Layer-No Net" (solid, pour order 1018): 15229,2081 15254,2106 15254,2156 15229,2181 15079,2181 15054,2156 15054,2106 15079,2081

## Keep-outs
Keep-Out Layer:
  lines w10: 4340,730 17891,730 17891,7840 4340,7840 4340,730

## Silkscreen, mask and mechanical layers (free items; w line width, h text height)
Top Overlay:
  lines w10: 15515.71,3312.05 15580.71,3312.05 ; 15515.71,3707.05 15580.71,3707.05 ; 15535.71,3282.05 15535.71,3347.05 ; 15535.71,3377.05 15535.71,3442.05 ; 15535.71,3472.05 15535.71,3537.05 ; 15535.71,3562.05 15535.71,3627.05 ; 15535.71,3657.05 15535.71,3722.05 ; 15545.71,5947.05 15610.71,5947.05 ; 15550.71,5477.05 15615.71,5477.05 ; 15570.71,5447.05 15570.71,5512.05 ; 15570.71,5542.05 15570.71,5607.05 ; 15570.71,5637.05 15570.71,5702.05 ; 15570.71,5727.05 15570.71,5792.05 ; 15570.71,5822.05 15570.71,5887.05 ; 15570.71,5912.05 15570.71,5977.05 ; 15603.74,3769.01 15603.74,4044.01 15806.03,4044.01 15806.03,3769.01 ; 15605.71,3312.05 15670.71,3312.05 ; 15605.71,3707.05 15670.71,3707.05 ; 15630.71,5947.05 15695.71,5947.05 ; 15640.71,5477.05 15705.71,5477.05 ; 15700.71,3312.05 15765.71,3312.05 ; 15700.71,3707.05 15765.71,3707.05 ; 15725.71,5947.05 15790.71,5947.05 ; 15735.71,5477.05 15800.71,5477.05 ; 15795.71,3312.05 15860.71,3312.05 ; 15795.71,3707.05 15860.71,3707.05 ; 15820.71,5947.05 15885.71,5947.05 ; 15825.71,3282.05 15825.71,3347.05 ; 15825.71,3377.05 15825.71,3442.05 ; 15825.71,3472.05 15825.71,3537.05 ; 15825.71,3562.05 15825.71,3627.05 ; 15825.71,3657.05 15825.71,3722.05 ; 15830.71,5477.05 15895.71,5477.05 ; 15860.71,5447.05 15860.71,5512.05 ; 15860.71,5542.05 15860.71,5607.05 ; 15860.71,5637.05 15860.71,5702.05 ; 15860.71,5727.05 15860.71,5792.05 ; 15860.71,5822.05 15860.71,5887.05 ; 15860.71,5912.05 15860.71,5977.05 ; 16002.03,3769.01 16002.03,4044.01 16193.74,4044.01 16193.74,3769.01 ; 16710.71,2312.05 16710.71,2147.05 17010.71,2147.05 17010.71,2312.05 ; 16710.71,2537.05 16710.71,2702.05 17010.71,2702.05 17010.71,2537.05 ; 16810.71,2147.05 16810.71,2312.05 ; 16815.71,2537.05 16815.71,2702.05 ; 16905.71,2147.05 16905.71,2312.05 ; 16910.71,2537.05 16910.71,2702.05
  text "GND" at 15600.71,5872.05 h60
  text "+5.0V" at 15715.71,5872.05 h60
  text "485 DI" at 16025.03,3785.97 h60
  text "485 RO" at 15618.74,3784.01 h60
  text "Keep Alive" at 15570.71,3637.05 h60 r270
  text "VTG" at 16775.71,2572.53 h60 r90
  text "GND" at 16972.71,2569.02 h60 r90
  text "MOSI" at 16874.21,2553.05 h60 r90
  text "MISO" at 16775.71,2184.05 h60 r90
  text "SCK" at 16874.21,2184.05 h60 r90
  text "RST" at 16972.71,2184.05 h60 r90
  text "ISP6PIN" at 16723.71,2095.05 h60
  text "BANCO AZTECA" at 16027,1740 h120
  text "BOARD:" at 16027,1635 h120
  text "BAZ-DOTMATRIX-01R03" at 16428,1631 h120
Mechanical 13:
  lines w10: 4150,1850 14910,1850 15310,2250 15310,7840 ; 8748.82,4033.86 12104.96,4033.86 ; 9625.15,4033.86 9958.22,4033.86 ; 9792.13,3443.31 9792.13,4821.26 ; 9792.13,3814.17 9792.13,4399.45 ; 4477.17,2163.78 15102.4,2163.78 15102.4,5903.94 4477.17,5903.94 4477.17,2163.78

## Dimensions
4340,7840 to 4340,730 on Mechanical 13
4340,7840 to 17891,7840 on Mechanical 13
12444.92,884.25 to 12886.22,627.95 on Mechanical 13
12180,1150 to 11785.91,1348.58 on Mechanical 13
12444.92,7695.28 to 12620.87,7990.16 on Mechanical 13

## Text inside footprints (layer, text, board x,y; h text height)
C10: Top Overlay "+" at 16515.71,6372.05 h98.43 r270
C11: Top Overlay "+" at 15715.71,6372.05 h98.43 r270
D13: Top Overlay "-" at 16780.71,5712.05 h60 r90; Top Overlay "+" at 16670.71,5707.05 h60 r90; Top Overlay "~" at 16775.71,5607.05 h60 r90; Top Overlay "~" at 16670.71,5607.05 h60 r90
P1: Top Overlay "1" at 16680.71,2355.51 h50; Top Overlay "2" at 16678,2464 h50; Top Overlay "5" at 17020.71,2355.51 h50; Top Overlay "6" at 17020.71,2455.51 h50